# Altium PCB JHDH-8412V1.PcbDoc
Units mm, origin at the board's own origin, x right, y up, seen from the top; angles counter-clockwise.
Board outline 62.8 x 23.1 mm, 2 copper layers (Top Layer, Bottom Layer); 115 components, 96 nets, 386 pads, 163 vias.
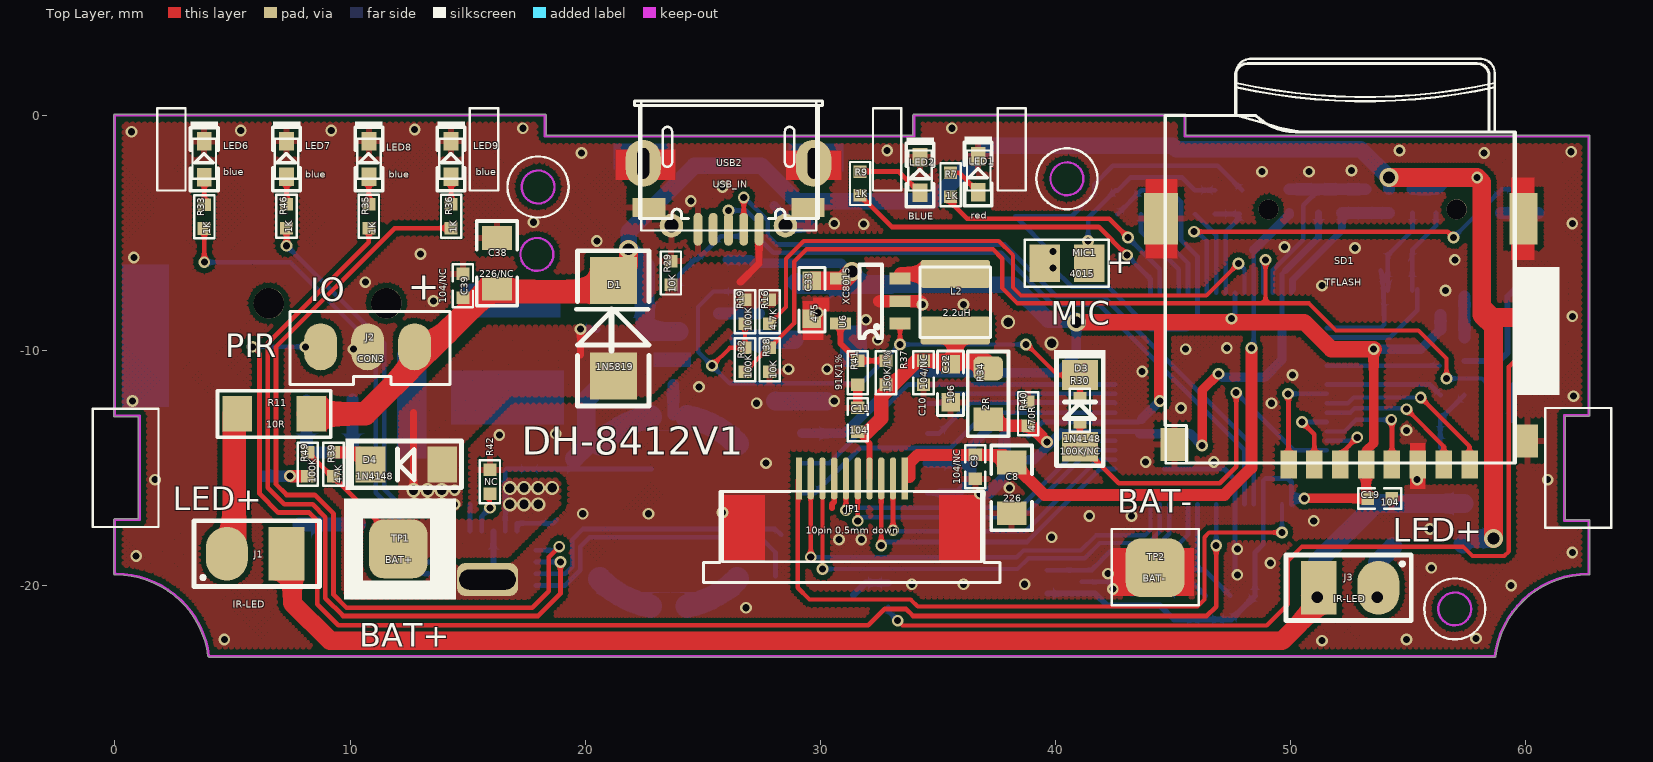
[diagram p0: Top Layer view]
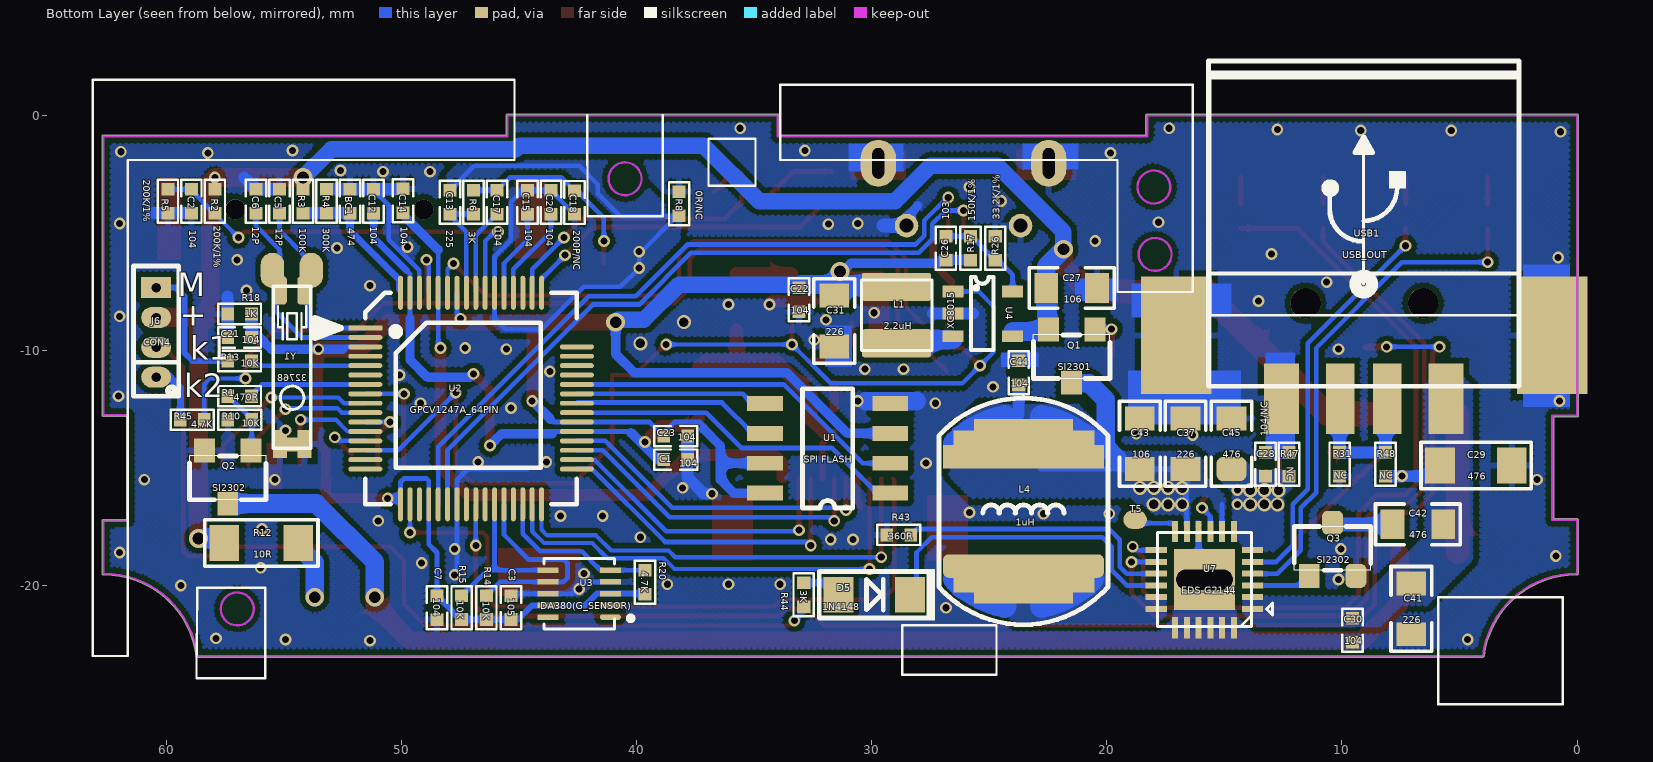
[diagram p1: Bottom Layer view, seen from below]
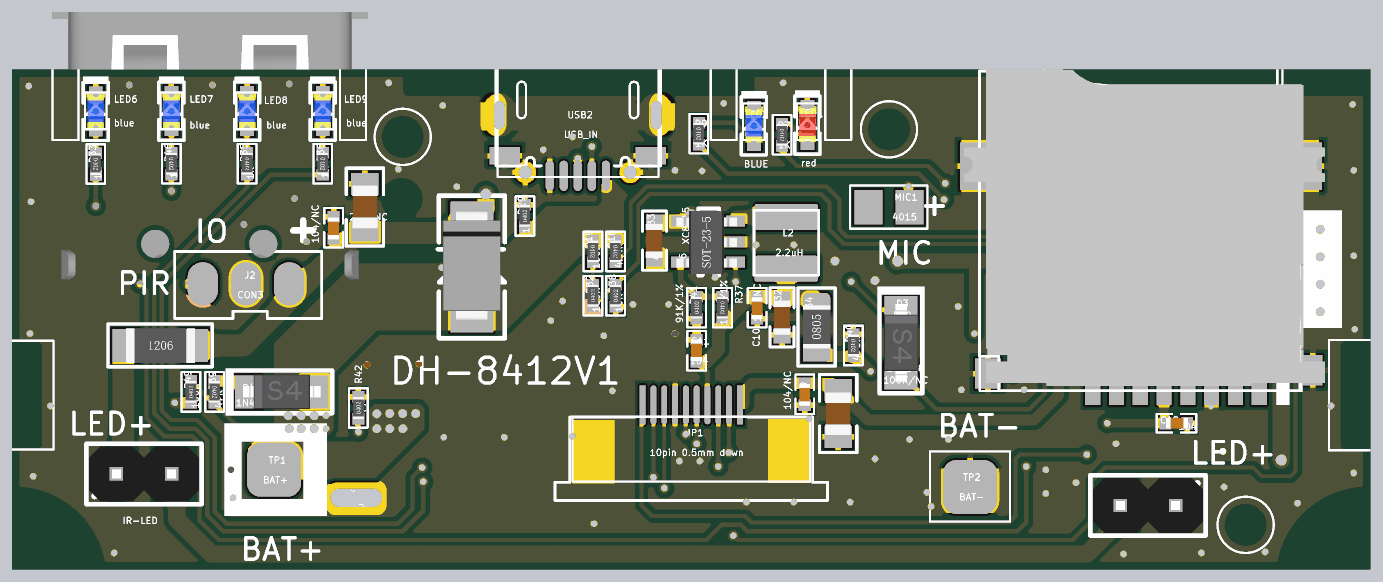
[diagram p2: 3D render of the assembled board from above, using the file's embedded part models]
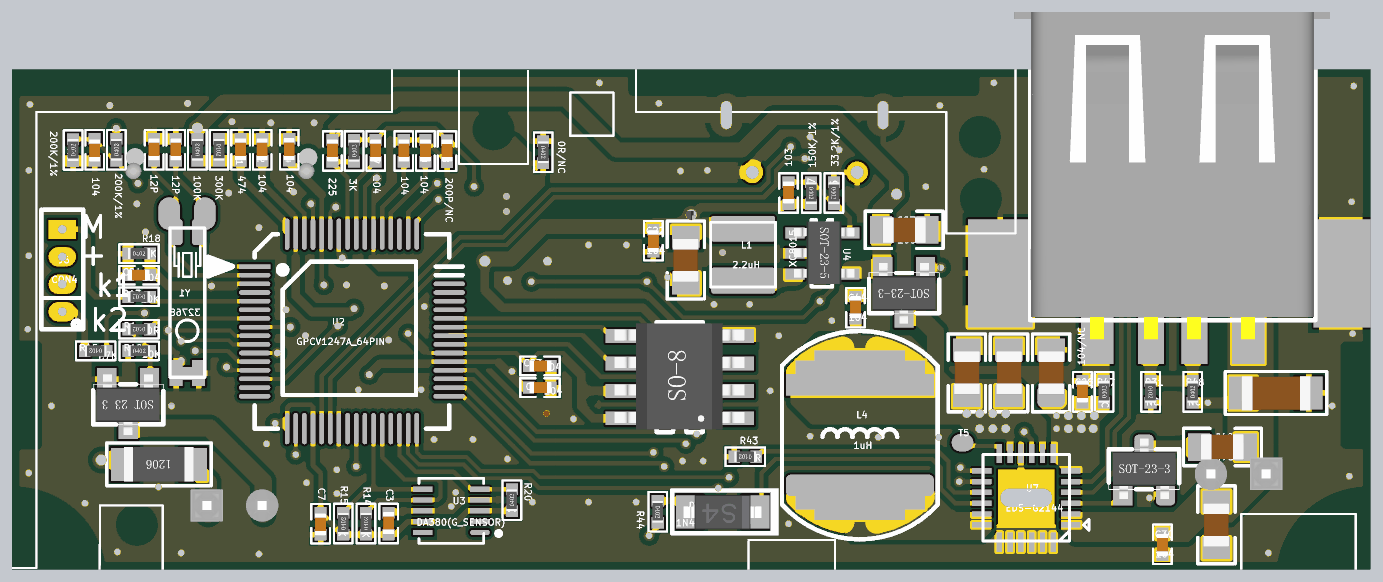
[diagram p3: 3D render of the assembled board from below, using the file's embedded part models]

## Layer stack, top to bottom
Top Solder: solder mask 0.0102, Solder Resist, Dk 3.5
Top Layer: signal copper 0.0356
Dielectric 1: dielectric 0.32, FR-4, Dk 4.8
Bottom Layer: signal copper 0.0356
Bottom Solder: solder mask 0.0102, Solder Resist, Dk 3.5

## Board outline
-0.05,-19.5 -0.05,-17.216 cw(c0,-17.216) 0,-17.165 0.999,-17.165 0.999,-12.835 0,-12.835 cw(c0,-12.784) -0.05,-12.784 -0.05,0 cw(c0,0) 0,0.05 18.29,0.05 cw(c18.29,0) 18.341,0 18.341,-0.85 33.95,-0.85 33.95,0 cw(c34,0) 34,0.05 45.5,0.05 cw(c45.5,0) 45.55,0 45.55,-0.85 62.7,-0.85 cw(c62.7,-0.9) 62.75,-0.9 62.75,-12.75 cw(c62.7,-12.75) 62.7,-12.8 61.7,-12.8 61.7,-17.2 62.7,-17.2 cw(c62.7,-17.25) 62.75,-17.25 62.75,-19.5 cw(c62.7,-19.5) 62.7,-19.55 62.669,-19.55 ccw(c62.669,-23.5) 58.75,-23.005 ccw(c62.669,-23.5) 58.75,-23.006 58.75,-23.005 cw(c58.7,-23) 58.7,-23.05 4,-23.05 3.95,-23.006 ccw(c0.031,-23.5) 0.031,-19.55 cw(c0.031,-19.5) 0.016,-19.548 cw(c0,-19.5)

## Design rules (kind name [scope] priority, off if disabled: settings)
Clearance [All] p1: gap=0.15 ignorepadtopadclearanceinfootprint=FALSE except(0.22: Arc-Fill Arc-Poly Arc-Region Track-Fill Track-Poly Track-Region SMDPad-Fill SMDPad-Poly SMDPad-Region THPad-Fill THPad-Poly THPad-Region Via-Fill Via-Poly Via-Region Fill-Fill Fill-Poly Fill-Region Poly-Poly Poly-Region Region-Region)
ComponentClearance [All] p1 off: gap=0.254 collisioncheckmode=3 verticalgap=0.254 showdistances=FALSE
Height [All] p1 off: minheight=0 maxheight=25.4 prefheight=12.7
HoleToHoleClearance [All] p1 off: gap=0.254 allowstackedmicrovias=TRUE
MinimumSolderMaskSliver [All] p1 off: minsoldermaskwidth=0.254
PolygonConnect PolygonConnect_1 [IsVia OR InNet('VCC_5V_USB')  OR InNet('VBAT') OR InNet('NetL4_1')  OR InNet('5V_OUT') OR InComponent('J2') OR InComponent('U7') OR InComponent('C30') OR InComponent('C41')] p1: connectstyle=Direct reliefconductorwidth=0.254 reliefentries=4 polygonreliefangle="90 Angle" airgapwidth=0.254
PolygonConnect [All] p2: connectstyle=Relief reliefconductorwidth=0.254 reliefentries=4 polygonreliefangle="90 Angle" airgapwidth=0.254
RoomDefinition JHDH-8412_1247 [InComponentClass('JHDH-8412_1247')] p1 off: confinementstyle=ConfineIn formatcopy=TRUE lockcomponents=FALSE outline 63.301,-27.85 68.4,-27.85 68.4,-25.1 63.301,-25.1
RoomDefinition JHDH-8412_powerbank [InComponentClass('JHDH-8412_powerbank')] p2 off: confinementstyle=ConfineIn formatcopy=TRUE lockcomponents=FALSE outline 63.3,-25 68.4,-25 68.4,-21.958 63.3,-21.958
RoutingVias [All] p1: holewidth=0.3 width=0.5 viastyle="Through Hole" minholewidth=0.3 minwidth=0.5 maxholewidth=0.711 maxwidth=1.27
SilkToSilkClearance [All] p1 off: silktosilkclearance=0.254
SilkToSolderMaskClearance [IsPad] p1 off: minsilkscreentomaskgap=0.254 clearancetoexposedcopper=TRUE
SolderMaskExpansion [All] p1: expansion=0.102
Width [All] p1: maxlimit=3 minlimit=0.16 preferedwidth=0.18
24 further rules are at their usual default settings.

## Components (designator, comment, footprint, x,y, rotation, side; value= is the part's Value field where it differs from the comment)
BC1 "474" C0402 52.2,-3.65 r90 bottom
C1 "104" C0402 38.35,-14.65 r180 bottom
C2 "104" C0402 58.95,-3.65 r270 bottom
C3 "105" C0402 45.35,-20.942 r90 bottom
C5 "12P" C0402 55.2,-3.65 r90 bottom
C6 "12P" C0402 56.2,-3.65 r90 bottom
C7 "104" C0402 48.5,-20.95 r270 bottom
C8 "226" C0805#1 38.15,-15.85 r270 top
C9 "104/NC" C0402 36.6,-14.958 r270 top
C10 "104/NC" C0402 34.4,-10.95 r270 top
C11 "104" C0402 31.6,-12.95 r90 top
C12 "104" C0402 51.2,-3.65 r90 bottom
C13 "225" C0402 47.95,-3.7 r90 bottom
C14 "104" C0402 49.95,-3.642 r90 bottom
C15 "104" C0402 44.65,-3.7 r90 bottom
C17 "104" C0402 45.95,-3.7 r90 bottom
C18 "200P/NC" C0402 42.65,-3.708 r90 bottom
C19 "104" C0402 53.8,-16.3 r0 top
C20 "104" C0402 43.65,-3.7 r90 bottom
C21 "104" C0402 56.9,-9.45 r0 bottom
C22 "104" C0402 33.1,-7.85 r270 bottom
C23 "104" C0402 38.35,-13.65 r180 bottom
C26 "103" C0402 26.85,-5.65 r90 bottom
C27 "106" C0805#1 21.5,-7.35 r180 bottom
C28 "104/NC" C0402 13.25,-14.85 r90 bottom (schematic designator C51)
C29 "476" c1206 4.3,-14.9 r180 bottom (schematic designator C50)
C30 "104" C0402 9.55,-21.9 r270 bottom (schematic designator C49)
C31 "226" C0805#1 31.6,-8.75 r270 bottom
C32 "106" C0603 35.55,-11.4 r270 top (schematic designator C37)
C33 "475" C0603 29.65,-7.85 r270 top (schematic designator C37)
C37 "226" C0805#1 16.65,-13.971 r90 bottom
C38 "226/NC" C0805#1 16.25,-6.3 r90 top
C39 "104/NC" c0402 14.8,-7.258 r270 top
C41 "226" C0805#1 7.05,-21 r270 bottom
C42 "476" C0805#1 6.77,-17.4 r0 bottom
C43 "106" C0805#1 18.6,-13.971 r90 bottom
C44 "104" C0402 23.75,-10.95 r90 bottom
C45 "476" C0805#2 14.7,-13.971 r90 bottom
D1 "1N5819" DO-214AC 21.206,-11.1 r90 top
D3 "1N4148" D1206 41.05,-12.574 r90 top
D4 "1N4148" D1206 12.4,-14.85 r180 top
D5 "1N4148" D1206 29.9,-20.4 r180 bottom
J1 "IR-LED" PIN-2/2.54 4.76,-18.65 r0 top value=0.02
J2 "CON3" SIP3/2.0 12.75,-9.85 r180 top value=0.03
J3 "IR-LED" PIN-2/2.54 53.75,-20.1 r180 top value=0.02
J6 "CON4" PIN-4/1.27 60.45,-11.14 r90 bottom value=0.04
JP1 "10pin 0.5mm down" 10PIN-MIPI/0.5 33.6,-15.45 r180 top value=0.09
L1 "2.2uH" L3015 28.95,-8.5 r90 bottom
L2 "2.2uH" L3015 35.75,-7.95 r270 top
L4 "1uH" CD75 23.55,-16.85 r90 bottom
LED1 "red" LED0603R 36.725,-2.502 r90 top
LED2 "BLUE" LED0603B 34.25,-2.538 r90 top
LED6 "blue" LED0603B 3.797,-1.867 r90 top
LED7 "blue" LED0603B 7.3,-1.862 r90 top
LED8 "blue" LED0603B 10.8,-1.862 r90 top
LED9 "blue" LED0603B 14.3,-1.862 r90 top
MIC1 "4015" MICe 41.45,-6.3 r180 top
Q1 "SI2301" SOT23#1 21.5,-10.25 r0 bottom
Q2 "SI2302" SOT23#1 57.4,-15.4 r0 bottom
Q3 "SI2302" SOT23#2 10.4,-18.45 r180 bottom
R1 "470R" R0402 56.9,-11.95 r0 bottom
R2 "200K/1%" R0402 57.95,-3.65 r90 bottom
R3 "100K" R0402 54.2,-3.65 r90 bottom
R4 "300K" R0402 53.2,-3.65 r270 bottom
R5 "200K/1%" R0402 59.95,-3.658 r90 bottom
R6 "3K" R0402 46.95,-3.7 r90 bottom
R7 "1K" R0402 35.55,-2.958 r270 top
R8 "0R/NC" R0402 38.2,-3.758 r270 bottom
R9 "1K" R0402 31.7,-2.9 r270 top
R10 "10K" R0402 56.892,-12.95 r180 bottom
R11 "10R" R1206 6.775,-12.7 r0 top
R12 "10R" R1206 55.975,-18.2 r0 bottom
R13 "10K" R0402 56.9,-10.45 r0 bottom
R14 "10K" R0402 46.4,-20.942 r90 bottom
R15 "10K" R0402 47.45,-20.942 r90 bottom
R16 "4.7K" R0402 27.85,-8.35 r270 top
R17 "150K/1%" R0402 25.8,-5.65 r270 bottom
R18 "1K" R0402 56.9,-8.45 r180 bottom
R19 "100K" R0402 26.8,-8.35 r270 top
R20 "4.7K" R0402 39.65,-19.858 r90 bottom
R26 "33.2K/1%" R0402 24.75,-5.65 r270 bottom
R29 "10K" R0402 23.65,-6.708 r90 top
R30 "100K/NC" R0402 41.05,-12.55 r90 top
R31 "NC" R0402 10.1,-14.85 r270 bottom
R32 "100K" R0402 26.8,-10.4 r90 top
R33 "1K" R0402 3.8,-4.308 r270 top
R34 "2R" R0805 37.15,-11.85 r90 top
R35 "1K" R0402 10.8,-4.292 r270 top
R36 "1K" R0402 14.3,-4.292 r270 top
R37 "150K/1%" R0402 32.8,-10.95 r270 top
R38 "10K" R0402 27.85,-10.4 r90 top
R39 "47K" R0402 9.3,-14.85 r270 top
R40 "470R" R0402 38.85,-12.7 r270 top
R41 "91K/1%" R0402 31.6,-10.95 r90 top
R42 "NC" R0402 15.95,-15.592 r90 top
R43 "360R" R0402 28.85,-17.85 r0 bottom
R44 "3K" R0402 32.9,-20.4 r270 bottom
R45 "4.7K" R0402 58.908,-12.95 r0 bottom
R46 "1K" R0402 7.3,-4.292 r270 top
R47 "NC" R0402 12.25,-14.85 r90 bottom
R48 "NC" R0402 8.15,-14.85 r90 bottom
R49 "100K" R0402 8.2,-14.85 r90 top
SD1 "TFLASH" TFC-0002 57.077,-4.001 r180 top locked
T5 "" PAD0#1 18.8,-17.2 r180 bottom
TP1 "BAT+" PAD0#2 12.05,-18.45 r0 top
TP2 "BAT-" PAD0#2 44.25,-19.25 r0 top
U1 "SPI FLASH" SOP8 29.217,-16.074 r0 bottom
U2 "GPCV1247A_64PIN" LQFP64-0.4 51.55,-9.05 r180 bottom
U3 "DA380(G_SENSOR)" QFN16-3*3-0.5-DA380 42.45,-20.35 r0 bottom
U4 "XC8015" SOT23-5 26.55,-7.495 r180 bottom
U6 "XC8015" SOT23-5 33.4,-8.85 r180 top
U7 "EDS-G2144" TQFN24-4*4 15.85,-19.75 r270 bottom
USB1 "USB_OUT" USB-A-SMT 6.55,-8 r180 bottom locked
USB2 "USB_IN" USB-009 27.4,-4.85 r0 top
Y1 "32768" XTAL-1.5X7 54.665,-10.72 r270 bottom

## Footprints (in the part's own frame and the unit in brackets; to place one, negate y for a bottom-side part, rotate by r counter-clockwise, add the part's x,y. Pads: shape width x height; smd on the part's side, far side on the other; paste and mask are expansions set on the pad)
10PIN-MIPI/0.5 [mm]
  rect 0.275x1.8 smd: 1(0,0) 10(4.5,0)
  oval 0.275x1.8 smd: 2(0.5,0) 3(1,0) 4(1.5,0) 5(2,0) 6(2.5,0) 7(3,0) 8(3.5,0) 9(4,0)
  Top Layer region: -3.2,0.714 -1.448,0.714 -1.448,3.482 -3.2,3.482
  Top Layer region: 7.7,3.482 5.948,3.482 5.948,0.714 7.7,0.714
  silkscreen extent -4.06,0.56 8.56,4.42
C0402 [mil] "0402"
  rect 21x22 smd: 1(-20,0) 2(20,0)
  silkscreen extent -36,-17 36,17, body extent -19,-10 21,10, height 10
c0402 [mil] "0402"
  rect 21x22 smd: 1(-20,0) 2(20,0)
  silkscreen extent -36,-17 36,17, body extent -19,-10 21,10, height 10
C0603 [mil] "0603"
  rect 31x31 smd: 1(-32,0) 2(32,0)
  silkscreen extent -54,-22 54,22, body extent -31,-16 32,15, height 24
C0805#1 [mil] "0805"
  rect 40x50 smd: 1(-42.5,0) 2(42.5,0)
  silkscreen extent -71,-34 71,34, body extent -39,-24 40,23, height 47
C0805#2 [mil] "0805"
  rrect50% 40x50 smd: 1(-42.5,0)
  rect 40x50 smd: 2(42.5,0)
  silkscreen extent -71,-34 71,34, body extent -39,-24 40,23, height 47
c1206 [mil] "1206"
  rect 50x60 smd: 1(-60,0) 2(60,0)
  silkscreen extent -92,-39 92,39, body extent -62,-32 63,31, height 63
CD75 [mm] "SMD inductance"
  rect 0.5x4.2 smd: 1(-3.675,0) 2(3.675,0)
  rect 1x6 smd: 1(-2.95,-0.025) 2(2.95,-0.025)
  rrect50% 1x6.85 smd: 1(-2.325,0)
  rect 1x6.85 smd: 2(2.325,0)
  Top Layer lines w1: -2.876,-2.926 cw(c0,0) -4.027,-0.786 ; 2.876,-2.926 ccw(c0,0) 4.027,-0.786 ; -4.027,0.786 cw(c0,0) -2.876,2.926 ; 4.027,0.786 ccw(c0,0) 2.876,2.926
  silkscreen extent -4.82,-3.6 4.82,3.6
D1206 [mil] "玻璃管"
  rect 50x60 smd: 1(-60,0) 2(60,0)
  silkscreen extent -92,-43 102,43, body extent -71,-32 71,31, height 43
DO-214AC [mm]
  rect 2x2 smd: 1(0,0.006) 2(4.064,0.006)
  silkscreen extent -1.27,-1.52 5.33,1.58, body extent -0.46,-1.32 4.65,1.35, height 2.12
L3015 [mm]
  rrect20% 1.2x2.95 smd: 1(-1.2,0) 2(1.2,0)
  silkscreen extent -1.5,-1.5 1.5,1.5, body extent -1.5,-1.5 1.5,1.5, height 1.6
LED0603B [mil] "0603-蓝灯"
  rect 31x25 smd: 1(-30,0) 2(30,0)
  silkscreen extent -53,-23 63,23, body extent -31,-16 31,15, height 20
LED0603R [mil] "0603-红灯"
  rect 31x25 smd: 1(-30,0) 2(30,0)
  silkscreen extent -53,-23 63,23, body extent -31,-16 31,15, height 20
LQFP64-0.4 [mm] "IC"
  rect 1.45x0.21 smd: 1(0,0)
  oval 1.45x0.21 smd: 2(0,-0.4) 3(0,-0.8) 4(0,-1.2) 5(0,-1.6) 6(0,-2) 7(0,-2.4) 8(0,-2.8) 9(0,-3.2) 10(0,-3.6) 11(0,-4) 12(0,-4.4) 13(0,-4.8) 14(0,-5.2) 15(0,-5.6) 16(0,-6) 33(9,-6) 34(9,-5.6) 35(9,-5.2) 36(9,-4.8) 37(9,-4.4) 38(9,-4) 39(9,-3.6) 40(9,-3.2) 41(9,-2.8) 42(9,-2.4) 43(9,-2) 44(9,-1.6) 45(9,-1.2) 46(9,-0.8)
  oval 0.21x1.45 smd: 17(1.5,-7.5) 18(1.9,-7.5) 19(2.3,-7.5) 20(2.7,-7.5) 21(3.1,-7.5) 22(3.5,-7.5) 23(3.9,-7.5) 24(4.3,-7.5) 25(4.7,-7.5) 26(5.1,-7.5) 27(5.5,-7.5) 28(5.9,-7.5) 29(6.3,-7.5) 30(6.7,-7.5) 31(7.1,-7.5) 32(7.5,-7.5) 49(7.5,1.5) 50(7.1,1.5) 51(6.7,1.5) 52(6.3,1.5) 53(5.9,1.5) 54(5.5,1.5) 55(5.1,1.5) 56(4.7,1.5) 57(4.3,1.5) 58(3.9,1.5) 59(3.5,1.5) 60(3.1,1.5) 61(2.7,1.5) 62(2.3,1.5) 63(1.9,1.5) 64(1.5,1.5)
  oval 1.45x0.21 on Bottom Overlay: 47(9,-0.4) 48(9,0)
  silkscreen extent -2.15,-7.5 9,1.5
MICe [mm]
  rect 1.3x1.6 smd: 1(0,0) 2(1.9,0)
  silkscreen extent -0.83,-1 2.75,1
PAD0#1 [mm]
  oval 1x0.8 smd: 1(0,0)
PAD0#2 [mm]
  rrect50% 2.5x2.5 smd: 1(0,0)
PIN-2/2.54 [mil] "Connector"
  oval 70x90 smd: 1(0,0)
  rect 60x90 smd: 2(100,0)
  silkscreen extent -55,-55 155,55, body extent -50,-50 150,50, height 342
PIN-4/1.27 [mm] "Connector"
  oval 0.889x1.27 hole 0.4: 1(0,0) 2(1.27,0) 3(2.54,0)
  rect 0.889x1.27 hole 0.4: 4(3.81,0)
  silkscreen extent -0.81,-0.97 4.72,0.97
QFN16-3*3-0.5-DA380 [mm]
  oval 0.9x0.24 smd: 1(-1.324,1)
  rect 0.9x0.24 smd: 2(-1.324,0.5) 3(-1.324,0) 4(-1.324,-0.5) 5(-1.324,-1) 6(1.324,-1) 7(1.324,-0.5) 8(1.324,0) 9(1.324,0.5) 10(1.324,1)
  silkscreen extent -2.29,-1.5 1.5,1.5
R0402 [mil] "0402"
  rect 21x22 smd: 1(-20,0) 2(20,0)
  silkscreen extent -36,-17 36,17, body extent -20,-10 20,10, height 14
R0805 [mil] "0805"
  rect 40x50 smd: 1(-42.5,0)
  rrect50% 40x50 smd: 2(42.5,0)
  silkscreen extent -71,-34 71,34, body extent -39,-25 40,25, height 22
R1206 [mil] "1206"
  rect 50x60 smd: 1(-62,0) 2(62,0)
  silkscreen extent -95,-39 95,39, body extent -62,-32 63,31, height 24
SIP3/2.0 [mm] "连接座/立式"
  oval 1.4x2 smd: 1(0,0) 2(2,0) 3(4,0)
  silkscreen extent -1.5,-1.5 5.3,1.6
SOP8 [mil] "IC"
  rect 60x25 smd: 1(0,0) 2(0,-50) 3(0,-100) 4(0,-150) 5(210,-150) 6(210,-100) 7(210,-50) 8(210,0)
  round 30 on Bottom Overlay: ""(82,3)
  silkscreen extent 63,-175 147,25, body extent -13,-173 224,20
SOT23#1 [mil] "SOT23"
  rect 35x40 smd: 1(-39,-45) 2(39,-45) 3(0,44)
  silkscreen extent -64,-36 64,38, body extent -57,-54 57,57
SOT23#2 [mil] "SOT23"
  rect 35x40 smd: 1(-39,-45)
  rrect50% 35x40 smd: 2(39,-45) 3(0,44)
  silkscreen extent -64,-36 64,38, body extent -57,-54 58,57
SOT23-5 [mil] "SOT25-5"
  rect 35x20 smd: 1(0,0) 2(0,-37) 3(0,-75) 4(100,-75) 5(100,0)
  silkscreen extent 30,-98 68,24, body extent -2,-93 108,21
TFC-0002 [mm] "TF卡外焊带弹片"
  round 0.85 hole 0.85 unplated: 0(0,0) 0(8,0.004)
  rect 0.7x1.2 smd: 1(7.15,10.858) 2(6.05,10.858) 3(4.95,10.858) 4(3.85,10.858) 5(2.75,10.858) 6(1.65,10.858) 7(0.55,10.858) 8(-0.55,10.858)
  rect 0.6x1.2 on Top Overlay: 9(-1.65,10.858)
  rect 0.9x1.4 smd: 10(-3.023,9.851)
  rect 1.2x2.2 smd: 10(-2.85,0.399)
  rect 1.2x1.4 smd: 10(12,10)
  rect 1.454x2.2 smd: 10(12.577,0.399)
  silkscreen extent -2.5,-6.2 12.4,10.8, body extent -3.6,-4.06 13.1,10.57, height 1.85
TQFN24-4*4 [mm] "G2144R51U"
  rect 2.6x2.6 / inner rect 1.4x2.6 / far side rrect50% 1.4x2.6 hole 0.85 slot 2.4 at 90 deg: 0(0,0)
  rect 0.25x0.9 smd: 1(1.25,2.05) 2(0.75,2.05) 3(0.25,2.05) 4(-0.25,2.05) 5(-0.75,2.05) 6(-1.25,2.05) 13(-1.25,-2.05) 14(-0.75,-2.05) 15(-0.25,-2.05) 16(0.25,-2.05) 17(0.75,-2.05) 18(1.25,-2.05)
  rect 0.9x0.25 smd: 7(-2.05,1.25) 8(-2.05,0.75) 9(-2.05,0.25) 10(-2.05,-0.25) 11(-2.05,-0.75) 12(-2.05,-1.25) 19(2.05,-1.25) 20(2.05,-0.75) 21(2.05,-0.25) 22(2.05,0.25) 23(2.05,0.75) 24(2.05,1.25)
  silkscreen extent -2,-2 2,2.9
USB-009 [mm]
  oval 0.381x1.4 smd: 1(0,0) 2(-0.65,0) 3(-1.3,0) 4(-1.95,0) 5(-2.6,0)
  oval 1.2x2.1 on Top Solder: 5(-5.2,2.833) 5(2.6,2.833)
  oval 1.5x2 hole 0.5 slot 1.3 at 90 deg: 5(-4.925,2.808) 5(2.325,2.808)
  rect 1.4x0.8 smd: 5(-4.675,0.933) 5(2.075,0.933)
  round 1 hole 0.6: 5(-3.725,0.158) 5(1.125,0.158)
  silkscreen extent -5.3,0.46 2.7,5.46
USB-A-SMT [mm]
  round 1.3 hole 1.3 unplated: 0(-5,0) 0(0,0)
  rect 1.5x3 smd: 1(0.975,-4.051) 4(-6.025,-4.051)
  rect 1.2x3 smd: 2(-1.525,-4.051) 3(-3.525,-4.051)
  rect 3x5 smd: 5(-10.5,-1.365) 5(5.5,-1.365)
  silkscreen extent -9.13,-3.53 4.08,10.31, body extent -9.84,-4.41 4.76,10.72, height 6.35
XTAL-1.5X7 [mm]
  rrect50% 1.2x0.6 smd: 1(-3.264,0.521) 2(-3.264,-0.521)
  rect 1.2x0.6 smd: 3(3.264,0.521) 4(3.264,-0.521)
  rect 0.6x1 smd: 3(3.28,0.015)
  silkscreen extent -3.45,-0.8 3.45,0.8, body extent -3.75,-0.8 3.75,0.8, height 1.5

## Part data
BC1 C1 C3 C5 C6 C7 C8 C9 C10 C11 C12 C13 C14 C15 C17 C18 C19 C20 C21 C22 C23 C28 C30 C37 C39 C41 C42 C43 C44 C45: library part CAP, "Capacitor"
C2 C26 C27 C31 C32 C33: library part CAP, "贴片电容"
C29: library part CAP1, "电解电容"
C38: library part CAP, "电容"
D1: "肖特基二极管"
D3 R32: library part DIODE, "二极管"
D4 D5: "玻璃二极管"
J1 J3: library part CON2, "Connector"
J2 J6: "Connector"
JP1: library part CON10, "Connector"
L1 L2 L4: library part L-1, "电感"
LED1: library part LED-R, "LED/红色"
LED2: library part LED-B, "LED/blue"
LED6 LED7: library part LED-b, "LED/蓝色"
LED8 LED9: library part LED-B, "LED/蓝色"
MIC1: library part MICROPHONE, "咪头"
Q1: library part MOSFETP, "场效应管/P"
Q2 Q3: library part MOSFETN, "Mosfet/N"
R1 R2 R3 R4 R5 R10 R11 R12 R13 R17 R18 R19 R26 R29 R30 R37 R38 R41 R45: library part RES, "贴片电阻"
R6 R7 R8 R9 R14 R15 R16 R20 R31 R33 R34 R35 R36 R39 R40 R42 R43 R44 R46 R47 R48 R49: library part RES, "Resistor"
SD1: library part SD-MICRO, "外卡卡座"
T5: library part CON1, "Test"
TP1 TP2: library part TP
U1: library part AT25010A
U2: library part GPCV12417A_64PIN
U3: library part DA380, "G-Sensor"
U4 U6: library part BL8021, "升压IC"
U7: library part Component_1
USB1: library part CON4, "Connector"
USB2: library part CON5, "Connector"
Y1: library part CRYSTAL, "Crystal"

## Free pads (board coordinates)
  oval 1x1.5 smd far side: 2(53.85,-6.6) 3(55.5,-6.6)

## Via types
v1: diameter 0.5, hole 0.3, Top Layer to Bottom Layer, tented both sides, 141 vias
v2: diameter 0.6, hole 0.4, Top Layer to Bottom Layer, tented both sides, 15 vias
v3: diameter 0.8, hole 0.5, Top Layer to Bottom Layer, tented both sides, 7 vias

## Nets (pads, with @x,y where several pads share a name; then routed paths per layer and width w, separated by ;. In a path a pad name is that pad's centre, name@x,y a point inside that pad or via, vN(x,y) a via of type N, cw(c..) or ccw(c..) an arc to the next point about the centre after c; other vN are vias at no path point)
5V: C27.1 C38.1 C39.2 D1.2 J2.1 J6.3 Q1.2 R2.2 R3.2 R11.2 R12.2 U4.4 | length 82.3
  Top Layer w0.8: D1.2 21.85,-6.386 v3(21.85,-5.7) ; v3(54.2,-2.65) v1(57.95,-2.65) 58.15,-2.85 58.15,-8.15 ; v3(58.65,-18) 58.65,-9 58.15,-8.5 58.15,-8.15 ; J6.3 58.6,-8.6 58.15,-8.15
  Top Layer w1: R11.2@8.225,-12.7 10.65,-12.7 15.85,-7.5 20.736,-7.5 D1.2
  Bottom Layer w0.5: R3.2 v3(54.2,-2.65)
  Bottom Layer w0.7: v3(21.85,-5.7) 21.85,-4.95 24.65,-2.15 27.5,-2.15 29,-3.65 34.8,-3.65 37.15,-1.3 45,-1.3 45.15,-1.45 53,-1.45 v3(54.2,-2.65)
  Bottom Layer w0.8: v3(21.85,-5.7) 22.58,-6.429 C27.1 ; C27.1@22.55,-7.4 22.55,-9.2 U4.4@24,-9.2 ; R12.2@57.35,-18.25 57.6,-18 v3(58.65,-18)
5V_OUT: C29.1 C30.1 C41.1 C42.1 R48.1 R49.1 U7.1 U7.2 USB1.1 | length 2.6
  Top Layer w0.5: v1(7.45,-15.35) 7.458,-15.358 R49.1
  Bottom Layer w0.5: C29.1@6.282,-15.358 R48.1
12MI: U2.4
AGND: C13.2 C15.2 C18.1 C20.2 MIC1.2 R8.2 U2.54 | length 29.9
  Bottom Layer w0.2: C18.1@42.65,-4.2 43.658,-3.192 C15.2 ; C15.2@44.831,-3.16 45.35,-3.679 45.35,-5.3 46.05,-6 U2.54 46.05,-8.65 45.6,-9.1 44.05,-9.1 42.25,-7.3 40.7,-7.3 v1(39.9,-6.5) 39.9,-5.9 38.3,-4.3 40.7,-4.3 41.656,-3.344 41.656,-2.944 42.45,-2.15 46.908,-2.15 C13.2
  other v1: 39.9,-5.8
AVDD: C8.1 C9.1 C14.1 JP1.1 U2.60 | length 27.8
  Top Layer w0.5: 33.8,-15.4 33.8,-14.8 34.15,-14.45 C9.1 37.83,-14.45 C8.1 39.53,-16.15 47.2,-16.15 48.35,-15 v1(48.35,-9.9)
  Bottom Layer w0.2: v1@48.45,-9.8 U2.60 48.45,-5.727
  Bottom Layer w0.4: 48.45,-5.727 49.95,-4.227 C14.1
CSI_D5: U2.29
CSI_D8: U2.26
CSI_D9: 
CSI_MCLK: JP1.10 U2.18 | length 29.7
  Top Layer w0.18: JP1.10 29.05,-15.5 29.05,-20.1 29.55,-20.6 33.85,-20.6 34.15,-20.9 46.05,-20.9 46.35,-20.6 46.35,-17.95 46.55,-17.75 v1(49.65,-17.75)
  Bottom Layer w0.18: v1(49.65,-17.75) U2.18
CSI_SCK: JP1.8 U2.31 | length 20
  Top Layer w0.18: v1(30.1,-19.3) JP1.8
  Bottom Layer w0.18: v1(30.1,-19.3) 38.4,-19.3 38.857,-18.843 41.257,-18.843 41.9,-18.2 43.95,-18.2 44.45,-17.7 U2.31
CSI_SDA: JP1.9 U2.32 | length 19.4
  Top Layer w0.18: v1(29.6,-18.8) JP1.9
  Bottom Layer w0.18: v1(29.6,-18.8) 38.363,-18.8 38.65,-18.513 41.087,-18.513 41.73,-17.87 43.813,-17.87 44.05,-17.633 U2.32
EN: D3.2 R19.2 R30.2 R32.2 U4.1 U6.1 | length 26.6
  Top Layer w0.18: v1(25.4,-10.65) 26.158,-9.892 R32.2 R19.2 ; v1(33.4,-9.75) U6.1 ; v1(38.75,-9.75) 38.8,-9.75 40.1,-11.05 D3.2 R30.2
  Bottom Layer w0.18: U4.1 25.455,-7.495 24.8,-8.15 24.8,-9.962 24.81,-9.972 24.81,-10.06 26.15,-11.4 31.75,-11.4 v1(33.4,-9.75) v1(38.75,-9.75)
G_INT_IOE2: R20.2 U2.30 U3.5 | length 7.1
  Bottom Layer w0.2: R20.2 U3.5 41.55,-19.35 42.35,-18.55 44.1,-18.55 44.85,-17.8 U2.30
G_SCL_IOE5: R15.2 U2.27 U3.6 | length 6.9
  Bottom Layer w0.2: U3.6 46.366,-19.35 R15.2 ; 46.05,-19.35 U2.27
G_SDA_IOE4: R14.2 U2.28 U3.7 | length 8.9
  Bottom Layer w0.2: U2.28 45.65,-17.85 44.6,-18.9 43.1,-18.9 42.95,-19.05 42.95,-19.7 43.1,-19.85 U3.7 45.816,-19.85 R14.2
GND: BC1.2 C1.2 C2.2 C3.2 C5.2 C6.2 C7.2 C8.2 C9.2 C10.2 C11.2 C12.2 C14.2 C19.2 C21.2 C22.2 C23.2 C27.2 C28.2 C29.2 C30.2 C31.2 C32.2 C33.2 C37.2 C38.2 C39.1 C41.2 C43.2 C44.2 C45.2 J2.2 JP1.7 LED1.2 LED2.2 LED6.2 LED7.2 LED8.2 LED9.2 Q2.2 Q3.2 R4.1 R5.1 R8.1 R10.1 R18.1 R26.1 R29.2 R31.2 R38.1 R40.1 R41.1 R42.2 R43.2 R47.2 SD1.6 SD1.10 TP2.1 U1.4 U2.23 U2.62 U3.4 U3.8 U4.2 U6.2 U7.0 U7.10 U7.19 U7.20 U7.21 U7.22 U7.23 U7.24 USB1.4 USB1.5 USB2.5@22.475,-2.042 USB2.5@22.725,-3.917 USB2.5@23.675,-4.692 USB2.5@24.8,-4.85 USB2.5@28.525,-4.692 USB2.5@29.475,-3.917 USB2.5@29.725,-2.042 Y1.3 Y1.4 | length 40
  Top Layer w0.25: 30.5,-16.7 30.5,-16.55 30.6,-16.45 JP1.7
  Top Layer w0.4: C11.2 R41.1
  Top Layer w0.5: 32.49,-7.91 v1@34.3,-7.91
  Bottom Layer w0.2: U3.4 42.25,-19.85 42.75,-20.35 U3.8 C3.2@45.266,-20.35 ; U2.62 49.25,-6.584 50.55,-5.284 50.55,-3.834 C12.2@51.242,-3.142
  Bottom Layer w0.21: 44.65,-15.05 47.2,-15.05 47.65,-15.5 U2.23 v1@47.65,-19.4
  Bottom Layer w0.25: U7.0@16.1,-19.5 U7.10
  Bottom Layer w0.4: 28.05,-3.85 28.709,-4.509 USB2.5@28.525,-4.692
  Bottom Layer w0.5: 25.7,-8.435 27.4,-8.435 ; v1(36.8,-16.1) 37.15,-16.1 37.842,-15.408 C1.2 C23.2 ; C14.2@49.958,-3.142 C12.2 51.242,-3.142 BC1.2 R4.1 ; C5.2 C6.2 56.208,-3.142 56.7,-2.65 ; C21.2 R18.1 57.408,-7.708 ; C2.2 60.558,-4.158
  Bottom Layer w0.6: USB2.5@28.525,-4.692 29.492,-4.692
  Bottom Layer w0.8: 28.1,-12.15 30.264,-12.164
  other v1: 51.35,-22.35 4.65,-22.3 54.95,-22.3 57.9,-22.25 26.85,-20.95 42.45,-20.15 59.4,-20 33.9,-19.95 36.1,-19.95 38.7,-19.95 10.15,-19.75 47.75,-19.55 42.25,-19.5 56,-19.25 49.15,-19.05 0.9,-18.75 62,-18.6 10.05,-18.45 47.75,-18.45 30.8,-18.05 31.75,-18.05 39.85,-17.95 55.95,-17.6 51,-17.25 41.45,-17.05 43.25,-17.05 19.9,-16.95 22.7,-16.95 25.85,-16.9 38.05,-15.85 1.7,-15.5 55.4,-15.5 60.95,-15.5 27.7,-14.8 43.85,-14.75 46.75,-14.75 16.35,-13.6 18.75,-13.55 54.95,-13.4 45.35,-12.45 27.3,-12.25 49.2,-12.25 0.75,-12.15 30.6,-12.15 62.05,-11.95 24.85,-11.55 50.1,-11.05 43.7,-10.9 28.65,-10.8 30.3,-10.8 10.15,-9.95 45.55,-9.95 47.3,-9.9 32.45,-9.55 31.95,-8.7 62,-8.55 29.9,-8.4 34.35,-8.05 36.1,-8.05 13.55,-7.9 56.6,-7.45 51.35,-7.25 10.65,-7.1 57,-6.15 0.8,-6.05 13,-5.9 52.75,-5.65 49.75,-5.6 20.5,-5.35 31.85,-4.631 30.6,-4.6 62,-4.6 17.8,-4.55 24.5,-3.65 25.85,-3.05 48.8,-2.4 50.8,-2.4 52.6,-2.35 19.85,-1.6 58.25,-1.6 61.95,-1.55 32.85,-1.5 54.65,-1.5 0.7,-0.7 5.35,-0.65 9.2,-0.65 12.75,-0.6 17.35,-0.55 35.6,-0.55
  other v2: 39.85,-9.7 38,-8.8
IOA0: U2.43
IOA1: U2.44
IOA2: U2.45
IOA3: U2.46
IOA4: 
IOA5: 
IOA6: R9.2 U2.49 | length 14.4
  Top Layer w0.2: R9.2 33.042,-4.75 41.85,-4.75 v1(43.05,-5.95)
  Bottom Layer w0.2: v1(43.05,-5.95) 44.05,-6.95 U2.49
IOA7: R7.2 U2.50 | length 11.3
  Top Layer w0.2: R7.2 35.55,-3.7 36.25,-4.4 42.3,-4.4 v1(43.1,-5.2)
  Bottom Layer w0.2: v1(43.1,-5.2) 44.45,-6.55 U2.50
IOB9: U2.19
IOC12: D3.1 R30.1 U2.14 | length 16.6
  Top Layer w0.2: R30.1 D3.1 41.148,-14.098 42.7,-15.65 46.993,-15.65 47.7,-14.943 v1(47.7,-11.8)
  Bottom Layer w0.2: v1(47.7,-11.8) 50.15,-14.25 U2.14
IOC13: U2.15
IOC14: U2.16
IOD10: R13.1 U2.5 | length 4.8
  Bottom Layer w0.2: U2.5 R13.1@56.35,-10.65
IOD13: R1.1 U2.7 | length 5
  Bottom Layer w0.2: U2.7 55.942,-11.45 R1.1@56.392,-11.9
IOE7: J2.3 U2.25 | length 59.6
  Top Layer w0.2: v1(5.85,-9.85) 6.15,-10.15 6.15,-16.1 6.95,-16.9 8.26,-16.9 8.6,-17.24 8.6,-20.8 9.5,-21.7 32.05,-21.7 32.75,-21 33.65,-21 33.95,-21.3 46.45,-21.3 46.85,-20.9 v1(46.85,-18.3)
  Top Layer w0.3: v1(8.1,-9.85) J2.3@9,-9.85
  Bottom Layer w0.2: v1(5.85,-9.85) v1(8.1,-9.85) ; v1(46.85,-18.3) U2.25
ISP_IOD11: U2.6
LINE0: C2.1 R2.1 R5.2 U2.55 | length 17.9
  Top Layer w0.18: v1(45.9,-4.95) 56.7,-4.95 v1(56.95,-5.2)
  Bottom Layer w0.18: v1(45.9,-4.95) 46.05,-4.95 46.45,-5.35 U2.55 ; v1(56.95,-5.2) 59,-3.15 R5.2
MCN: JP1.2 U2.34 | length 12.9
  Top Layer w0.2: v1(33.1,-17.65) JP1.2
  Bottom Layer w0.2: v1(33.1,-17.65) 33.15,-17.7 38.75,-17.7 41.8,-14.65 U2.34
MCP: JP1.3 U2.33 | length 14.1
  Top Layer w0.2: v1(32.6,-18.3) JP1.3
  Bottom Layer w0.2: v1(32.6,-18.3) 32.75,-18.15 38.8,-18.15 41.9,-15.05 U2.33
MDN: JP1.6 U2.36 | length 14
  Top Layer w0.2: v1(31.1,-16.8) JP1.6
  Bottom Layer w0.2: v1@31.125,-16.825 31.25,-16.7 38.5,-16.7 41.35,-13.85 U2.36
MDP: JP1.5 U2.35 | length 14
  Top Layer w0.2: v1(31.6,-17.25) JP1.5
  Bottom Layer w0.2: v1(31.6,-17.25) 31.75,-17.1 38.6,-17.1 41.45,-14.25 U2.35
MICBIAS: C13.1 R6.1 U2.57 | length 4.5
  Bottom Layer w0.2: R6.1@46.8,-4.2 C13.1@47.85,-4.2 ; U2.57 47.25,-4.95 C13.1@47.85,-4.35
MICP: C17.1 U2.56 | length 3.7
  Bottom Layer w0.2: C17.1 45.958,-4.208 46.85,-5.1 U2.56
MICVREF: C20.1 U2.52 | length 4
  Bottom Layer w0.2: C20.1 43.65,-4.95 45.25,-6.55 U2.52
MODE: J6.4 R13.2 | length 5.4
  Bottom Layer w0.25: R13.2 58.9,-10.45 59.25,-10.1 59.25,-7.7 59.62,-7.33 J6.4@60.15,-7.33
NetC17_2: C17.2 C18.2 MIC1.1 R6.2 | length 8.3
  Top Layer w0.2: MIC1.1@41.4,-6.3 v1(41.4,-5.35)
  Bottom Layer w0.2: v1(41.4,-5.35) 41.4,-4.35 42.55,-3.2 C18.2 43.2,-2.65 45.408,-2.65 C17.2@45.942,-3.184 ; C17.2 C17.2@45.942,-3.184 ; R6.2@46.8,-3.184 C17.2@45.942,-3.184
NetC26_2: C26.2 R17.1 R26.2 U4.5 | length 4.2
  Bottom Layer w0.2: R26.2 25.766,-5.142 R17.1 C26.2
  Bottom Layer w0.21: U4.5 24.01,-6.79 R26.2@24.696,-6.104
NetC42_2: C42.2 Q3.3 | length 2.5
  Bottom Layer w0.6: C42.2 Q3.3@10.382,-17.4
NetD4_2: D4.2 R39.1 | length 1.1
  Top Layer w0.5: R39.1 D4.2@10.368,-14.342
NetD5_1: D5.1 R44.1 | length 1.7
  Bottom Layer w0.3: D5.1 31.932,-19.892 R44.1
NetD5_2: D5.2 U7.16 | length 12.9
  Bottom Layer w0.2: U7.16 19.152,-20 19.8,-19.352 19.8,-18.35 20.2,-17.95 27.45,-17.95 28.1,-18.6 28.1,-19.6
NetJ1_1: J1.1 R11.1 | length 5.9
  Top Layer w1: J1.1@5.075,-18.585 R11.1@5.075,-12.7
NetJ1_2: J1.2 J3.2 Q2.3 | length 56.1
  Top Layer w0.8: J1.2@7.55,-18.65 7.55,-20.75 9.15,-22.35 49.65,-22.35 51.15,-20.85 v3(51.15,-20.5)
  Bottom Layer w0.8: v3(51.15,-20.5) 51.15,-19 53.632,-16.518 Q2.3
NetJ3_1: J3.1 R12.1 | length 2.4
  Bottom Layer w0.8: v3(53.7,-20.5) 53.7,-19.025 R12.1@54.375,-18.35
NetL1_1: L1.1 U4.3 | length 2.4
  Bottom Layer w0.8: U4.3@26.55,-9.55 L1.1@28.9,-9.55
NetL2_1: L2.1 U6.3 | length 2.3
  Top Layer w0.6: U6.3@33.45,-6.75 L2.1
NetL4_1: L4.1 U7.17 U7.18
NetLED1_1: LED1.1 R7.1 | length 1.5
  Top Layer w0.2: R7.1 35.911,-2.45 LED1.1
NetLED2_1: LED2.1 R9.1 | length 2.9
  Top Layer w0.2: R9.1 33.342,-2.392 LED2.1
NetLED6_1: LED6.1 R33.1 | length 1.2
  Top Layer w0.2: R33.1 LED6.1@3.8,-2.612
NetLED7_1: LED7.1 R46.1 | length 1.2
  Top Layer w0.2: R46.1 LED7.1
NetLED8_1: LED8.1 R35.1 | length 1.2
  Top Layer w0.2: R35.1 LED8.1
NetLED9_1: LED9.1 R36.1 | length 1.2
  Top Layer w0.2: R36.1 LED9.1
NetQ2_1: Q2.1 R1.2 R10.2 | length 2.7
  Bottom Layer w0.2: Q2.1@56.384,-14.132 R10.2 56.384,-12.924 R1.2@57.408,-11.9
NetQ3_1: Q3.1 U7.3 | length 2.1
  Bottom Layer w0.2: Q3.1@11.748,-20 U7.3
NetR31_1: R31.1 R48.2 USB1.2 USB1.3 | length 6.4
  Bottom Layer w0.5: USB1.2@8.15,-12.126 R48.2 R31.1 USB1.3@10.1,-12.076
NetR33_2: R33.2 U7.4 | length 21.6
  Top Layer w0.2: v1(3.8,-6.25) R33.2
  Bottom Layer w0.2: v1(3.8,-6.25) 7.45,-6.25 11.1,-9.9 11.1,-16.05 11.75,-16.7 11.75,-18.5 12.75,-19.5 U7.4
NetR35_2: R35.2 U7.14 | length 32.4
  Top Layer w0.2: R35.2 10.8,-5.4 6.5,-9.7 6.5,-15.85 7.2,-16.55 8.405,-16.55 8.95,-17.095 8.95,-20.545 9.705,-21.3 18,-21.3 18.95,-20.35 v1(18.95,-19)
  Bottom Layer w0.2: U7.14 v1(18.95,-19)
NetR36_2: R36.2 U7.13 | length 34.6
  Top Layer w0.2: R36.2 11.895,-4.8 6.85,-9.845 6.85,-15.7 7.3,-16.15 8.5,-16.15 9.3,-16.95 9.3,-20.4 9.85,-20.95 17.75,-20.95 18.45,-20.25 18.45,-18.793 18.893,-18.35 v1(18.9,-18.35)
  Bottom Layer w0.2: U7.13 18.75,-18.5 v1(18.9,-18.35)
NetR37_1: R37.1 R41.2 U6.5 | length 3
  Top Layer w0.25: U6.5 30.86,-9.702 R41.2 R37.1@32.7,-10.442
NetR42_1: R42.1 U7.9 | length 1.7
  Top Layer w0.2: R42.1@15.8,-16.25 15.95,-16.4 v1(15.95,-16.7)
  Bottom Layer w0.2: U7.9 15.6,-17.05 v1(15.95,-16.7)
NetR43_1: R43.1 U7.15 | length 12
  Bottom Layer w0.2: U7.15 19.157,-19.5 19.45,-19.207 19.45,-18.05 19.9,-17.6 28.092,-17.6 R43.1
NetR46_2: R46.2 U7.5 | length 17.5
  Top Layer w0.2: v1(7.3,-5.55) R46.2
  Bottom Layer w0.2: v1(7.3,-5.55) 11.45,-9.7 11.45,-15.9 12.1,-16.55 12.1,-18.3 12.8,-19 U7.5
NetT5_1: T5.1 U7.12 | length 2.1
  Bottom Layer w0.2: U7.12 17.1,-17.35 18.65,-17.35 T5.1
PB_KEY: J6.2 R44.2 | length 38.9
  Top Layer w0.18: v1(33.3,-21.5) 33.5,-21.7 49,-21.7 49.9,-20.8 49.9,-18.95 50.5,-18.35 57.35,-18.35 57.75,-18.75 59.1,-18.75 59.3,-18.55 59.3,-10.7 60.13,-9.87 J6.2
  Bottom Layer w0.18: R44.2 32.9,-21.1 v1(33.3,-21.5)
PW_KEY: J6.1 R45.2 | length 2.6
  Bottom Layer w0.3: R45.2 59.416,-11.584 59.86,-11.14 J6.1
PWR_ON0: R32.1 R38.2 R45.1 U2.61 | length 43.7
  Top Layer w0.18: R32.1 26.8,-10.9 R38.2@27.808,-9.892 ; R38.2 28.9,-8.842 28.9,-6.217 29.417,-5.7 37.35,-5.7 37.75,-6.1 37.75,-7.35 38.4,-8 48.95,-8 ; v1(48.95,-6.15) 48.95,-8 ; v1(56.65,-11.2) 56.65,-10.35 55.45,-9.15 51.95,-9.15 50.8,-8 48.95,-8
  Bottom Layer w0.18: U2.61 48.85,-6.2 48.9,-6.15 v1(48.95,-6.15) ; v1(56.65,-11.2) 57.65,-11.2 58.15,-11.2 58.4,-11.45 R45.1
PWR_ON1: R16.2 U2.59 | length 26.3
  Top Layer w0.18: R16.2 28.55,-8.158 28.55,-6.1 29.3,-5.35 37.6,-5.35 38.2,-5.95 38.2,-7.32 38.55,-7.67 46.43,-7.67 v1(47.8,-6.3)
  Bottom Layer w0.18: v1(47.8,-6.3) 48.05,-6.55 U2.59
SDC_CLK: SD1.5 U2.12 | length 4.8
  Top Layer w0.2: SD1.5 v1@54.327,-12.977
  Bottom Layer w0.18: U2.12 52.3,-13.45 52.8,-12.95 v1(54.3,-12.95)
SDC_CMD: SD1.3 U2.13 | length 2.4
  Top Layer w0.18: SD1.3@52.127,-14.423 v1(52.85,-13.7)
  Bottom Layer w0.18: U2.13 52.7,-13.85 v1(52.85,-13.7)
SDC_DATA0: SD1.7 U2.10 | length 6.5
  Top Layer w0.18: v1(54.95,-12.5) 56.527,-14.077
  Top Layer w0.2: SD1.7 56.527,-14.077
  Bottom Layer w0.18: U2.10 52.55,-12.65 52.74,-12.46 54.91,-12.46 v1(54.95,-12.5)
SDC_DATA1: SD1.8 U2.9 | length 7.8
  Top Layer w0.18: v1(55.55,-12) 57.627,-14.077 SD1.8@57.627,-14.3
  Top Layer w0.2: SD1.8 SD1.8@57.627,-14.3
  Bottom Layer w0.18: U2.9 52.45,-12.25 52.7,-12 v1(55.55,-12)
SDC_DATA2: SD1.1 U2.8 | length 4.6
  Top Layer w0.2: SD1.1 v1@49.927,-11.877
  Bottom Layer w0.2: v1(49.9,-11.85) U2.8
SDC_DATA3: SD1.2 U2.11 | length 3.1
  Top Layer w0.2: v1(50.5,-13.05) 51.027,-13.577 SD1.2
  Bottom Layer w0.2: v1(50.5,-13.05) U2.11
SPI_CLK: U1.6 U2.40 | length 8.6
  Bottom Layer w0.2: U1.6 35.066,-13.534 36.379,-12.221 42.521,-12.221 U2.40
SPI_CS: U1.1 U2.39 | length 14.8
  Bottom Layer w0.2: U1.1 29.776,-16.074 31.7,-14.15 35.55,-14.15 37.05,-12.65 U2.39
SPI_RX: U1.5 U2.41 | length 8.2
  Bottom Layer w0.2: U1.5 35.086,-12.264 35.5,-11.85 U2.41
SPI_TX: U1.2 U2.42 | length 14.7
  Bottom Layer w0.2: U1.2 30.396,-14.804 33.75,-11.45 U2.42
USB5V: 
USB_DM: U2.21 USB2.2 | length 30.3
  Top Layer w0.18: USB2.2 USB2.2@26.75,-4.65
  Top Layer w0.2: USB2.2@26.75,-4.65 v1(26.75,-3.5)
  Bottom Layer w0.2: v1(26.75,-3.5) 26.8,-3.5 27.775,-4.475 27.775,-5.125 28.15,-5.5 37.845,-5.5 40.045,-7.7 42.05,-7.7 48.45,-14.1 U2.21
USB_DP: U2.22 USB2.3 | length 29.7
  Top Layer w0.18: USB2.3 v1(26.1,-4.05)
  Bottom Layer w0.2: v1(26.1,-4.05) 26.855,-4.05 27.425,-4.62 27.425,-5.275 28,-5.85 37.7,-5.85 39.9,-8.05 41.872,-8.05 48.05,-14.228 U2.22
V33_RTC: BC1.1 R3.1 R4.2 U2.64 | length 6.3
  Bottom Layer w0.2: U2.64 U2.64@50.05,-7.4
  Bottom Layer w0.3: U2.64@50.1,-7.4 50.1,-7 52.2,-4.9 BC1.1
  Bottom Layer w0.5: BC1.1 R4.2 R3.1
VBAT: C37.1 C43.1 C44.1 L4.2 Q1.3 R39.2 R49.2 TP1.1 U7.8 U7.11 | length 21.5
  Top Layer w0.2: R49.2 R39.2@9.216,-15.358 ; R39.2@9.358,-15.358 R39.2 9.3,-15.4 11.9,-18 TP1.1@11.9,-18.7
  Bottom Layer w0.2: U7.8 15.1,-16.55 ; U7.11 C37.1@16.6,-15.1 ; C37.1 C43.1 22.825,-15.05
  Bottom Layer w0.5: 23.75,-12.742 C44.1
  Bottom Layer w0.8: 19.55,-14.6 20.05,-14.1 20.05,-12.1 20.75,-11.4 Q1.3@21.45,-11.4
  other v2: 16.8,-16.55 17.4,-16.55 18.008,-16.55 16.8,-15.86 17.4,-15.85 18,-15.85 18.6,-15.85
VCC33_ADC: C15.1 U2.53 | length 3.8
  Bottom Layer w0.2: C15.1 44.65,-5.3 45.65,-6.3 U2.53
VCC_5V_USB: C28.1 C45.1 D1.1 D4.1 Q1.1 R16.1 R19.1 R29.1 R47.1 U7.6 U7.7 USB2.1 | length 7.7
  Top Layer w0.3: v2(12.7,-15.95) 12.7,-12.65 ; 19.8,-10.2 v1(19.8,-9.1) ; 26.6,-7.1 27.4,-6.3 USB2.1
  Bottom Layer w0.3: v1(19.8,-9.1) 20.502,-9.1 Q1.1
  other v1: 14.45,-16.55 14.45,-15.95
  other v2: 12.75,-16.55 13.3,-16.55 13.9,-16.55 13.3,-15.95 13.9,-15.95
VCC_12: C1.1 C12.1 R34.1 R40.2 U2.37 U2.63 | length 23.9
  Top Layer w0.4: v1(46.25,-14.05) 46.25,-11.7 v1(46.95,-11)
  Top Layer w0.5: R34.1@37.35,-12.879 37.678,-13.208 R40.2 38.958,-13.208 v1(39.65,-13.9)
  Bottom Layer w0.2: 40.35,-13.45 U2.37 43.5,-13.45 ; 49.65,-8.65 U2.63 49.65,-6.75 49.8,-6.6
  Bottom Layer w0.3: 49.8,-6.6 51.2,-5.2 C12.1
  Bottom Layer w0.4: C1.1 39.1,-14.65 40.25,-13.5 ; 43.6,-13.55 45.75,-13.55 v1(46.25,-14.05) ; v1(46.95,-11) 47.1,-11.15 48.9,-11.15 49.65,-10.4 49.65,-8.65
VCC_15: C10.1 C11.1 C32.1 JP1.4 L2.2 R34.2 R37.2 | length 10.9
  Top Layer w0.25: C11.1 32.1,-13.958 JP1.4
  Top Layer w0.6: 32,-13.5 32.6,-12.9 32.6,-11.95 34.108,-10.442 34.5,-10.442 C32.1@35.75,-10.442 ; C32.1@35.75,-10.537 C32.1@35.75,-10.442 ; L2.2 C32.1@35.75,-10.442 ; R34.2@37.35,-10.72 37.072,-10.442 C32.1@35.75,-10.442
VCC_33: C3.1 C7.1 C19.1 C21.1 C22.1 C23.1 C26.1 C31.1 C33.1 L1.2 R14.1 R15.1 R17.2 R18.2 R20.1 SD1.4 U1.3 U1.7 U1.8 U2.3 U2.17 U2.20 U2.38 U2.58 U3.3 U3.9 U6.4 | length 101.4
  Top Layer w0.4: v1(50.6,-16.3) C19.1 ; C19.1@53.227,-16.242 SD1.4 53.227,-14.273 53.55,-13.95 v1(53.55,-9.95)
  Top Layer w0.5: v1(44.45,-12.15) 44.45,-8.85
  Top Layer w0.7: v3(40.9,-8.8) 50.6,-8.8 51.75,-9.95 v1(53.55,-9.95)
  Top Layer w0.8: C33.1 30.963,-7.037 v3(31.35,-6.65)
  Bottom Layer w0.2: U1.8 U1.8@35.1,-16.074 ; 36.446,-15.504 36.5,-15.45 36.5,-14.75 ; 37.075,-13.275 37.3,-13.05 38.4,-13.05 38.858,-13.508 C23.1 39.458,-13.05 U2.38 43.55,-13.05 43.675,-12.925
  Bottom Layer w0.21: v1(47.5,-8.65) 47.65,-8.5 U2.58 ; C7.1 48.5,-18.6 48.85,-18.25 U2.20 48.85,-15.55 48.95,-15.45 49.9,-15.45 50.05,-15.6 U2.17 ; U2.3 52.413,-9.85 52.513,-9.95
  Bottom Layer w0.25: R20.1@39.666,-20.35 U3.3 41.7,-20.35 42.2,-20.85 U3.9 44.45,-20.85 45.05,-21.45 C3.1 R14.1 R15.1 47.492,-21.45 C7.1
  Bottom Layer w0.4: R17.2@26.05,-6.15 27.05,-6.15 27.2,-6.3 30.9,-6.3 v3@31.3,-6.7 ; U1.3 31.03,-13.534 33.614,-10.95 40.1,-10.95 40.9,-10.15 v3(40.9,-8.8) ; v3(31.35,-6.65) 31.5,-6.65 v3@31.65,-6.8 ; C31.1@31.65,-7.271 31.65,-7.2 v3@31.65,-6.8 ; C31.1@32.05,-7.2 v3@31.65,-6.8 ; U1.7 36.446,-14.804 ; U1.8@35.1,-16.074 35.876,-16.074 36.446,-15.504 36.446,-14.804 ; 37.15,-13.35 36.446,-14.054 36.446,-14.804 ; 43.675,-12.925 v1(44.45,-12.15) ; U2.17@50.15,-16.3 v1(50.6,-16.3) ; 52.513,-9.95 v1(53.55,-9.95) 55.55,-9.95 56.392,-9.108
  Bottom Layer w0.5: 56.392,-9.108 R18.2@56.392,-8.5
  Bottom Layer w0.7: C22.1@32.992,-7.2 38.2,-7.2 39.7,-8.7 40.8,-8.7 v3(40.9,-8.8)
  Bottom Layer w0.8: L1.2@29,-7.1 29.1,-7.2 31.65,-7.2 32.05,-7.2 C22.1@32.992,-7.2
X32KI: C6.1 pad.3 U2.2 Y1.2 | length 8.9
  Bottom Layer w0.2: U2.2 54.25,-9.45 55.4,-8.3 Y1.2@55.4,-7.4 ; Y1.2 55.186,-5.714 56.2,-4.7 C6.1
X32KO: C5.1 pad.2 U2.1 Y1.1 | length 9.2
  Bottom Layer w0.2: U2.1 53.85,-9.05 54,-8.9 53.971,-7.46 pad.2 54,-7.05 pad.2@54.144,-6.906 ; Y1.1 pad.2@54.144,-6.906 ; C5.1 55.2,-4.9 54.144,-5.956 pad.2@54.144,-6.906
pads on no net: SD1.0 SD1.9 U1. U2.24 U2.47 U2.48 U2.51 U3.1 U3.2 U3.10 USB1.0 USB2.4 USB2.5@22.2,-2.017 USB2.5@30,-2.017

## Polygon pours and split planes (outlines as drawn)
VCC_5V_USB on Bottom Layer "VCC_5V_USB" (hatched 45Degree grid 0.2 track 0.2, remove dead copper, pour order 0): 14.15,-14.75 13.75,-15.15 12.35,-15.15 12.1,-15.4 12.1,-15.75 12.55,-16.2 12.55,-18.15 12.9,-18.5 14,-18.5 14.6,-17.9 14.6,-16 15.2,-15.4 15.2,-14.95 15,-14.75
VBAT on Bottom Layer "VBAT" (hatched 45Degree grid 0.2 track 0.2, remove dead copper, pour order 2): 21.25,-12.35 20,-13.6 20,-13.8 19.45,-14.35 16.3,-14.35 15.9,-14.75 15.9,-15.35 15,-16.25 15,-17.4 15.2,-17.6 15.25,-17.55 17.6,-17.55 18.9,-16.25 25.75,-16.25 26.65,-15.35 26.65,-13.6 25.4,-12.35
NetL4_1 on Bottom Layer "L4-1" (hatched 45Degree grid 0.2 track 0.2, remove dead copper, pour order 4): 23.9,-19.1 20.55,-19.1 19.15,-20.5 17.65,-20.5 17.55,-20.6 17.55,-21.25 17.9,-21.6 23.85,-21.6 24.15,-21.3 24.15,-19.35
5V_OUT on Bottom Layer "5V-OUT" (hatched 45Degree grid 0.2 track 0.2, remove dead copper, pour order 6): 9,-20.5 6.45,-17.95 6.45,-11.5 5.95,-11 5.05,-11 4.5,-11.55 4.5,-18.9 6.4,-20.8 7.5,-20.8 8.4,-21.7 13.6,-21.7 14.15,-21.15 14.15,-20.65 14,-20.5
AGND on Bottom Layer "AGND" (hatched 45Degree grid 0.18 track 0.18, remove dead copper, pour order 16): 48.15,-2.65 47.45,-1.95 40.7,-1.95 38.2,-4.45 38.2,-6.75 38.9,-7.45 41.9,-7.45 43.65,-9.2 45.75,-9.2 46.2,-8.75 46.2,-5.2 48.15,-3.25
GND on Bottom Layer "GND" (hatched 45Degree grid 0.18 track 0.18, remove dead copper, pour order 18): -0.05,0.1 -0.05,-23.05 62.75,-23.05 62.75,0.1
VBAT on Top Layer "VBAT" (hatched 45Degree grid 0.2 track 0.2, remove dead copper, pour order 8): 11.3,-18.8 10.95,-18.45 10.95,-17.5 11.2,-17.25 14.25,-17.25 15.95,-17.25 16.5,-16.7 16.5,-15.75 16.75,-15.5 18.75,-15.5 18.9,-15.65 18.9,-16.55 16.65,-18.8
VCC_5V_USB on Top Layer "VCC_5V_USB" (hatched 45Degree grid 0.2 track 0.2, remove dead copper, pour order 10): 27.4,-5.15 27.3,-5.25 27.3,-6.15 27.25,-6.15 27.05,-6.35 24.7,-6.35 22.05,-9 15.8,-9 12.15,-12.65 12.15,-16.55 12.35,-16.75 14.5,-16.75 14.7,-16.55 14.7,-14 16.8,-11.9 22.75,-11.9 26.5,-8.15 27.95,-8.15 28.35,-7.75 28.35,-5.8 27.7,-5.15
GND on Top Layer "GND" (hatched 45Degree grid 0.18 track 0.18, remove dead copper, pour order 12): -0.05,0 62.85,0 62.85,-23 -0.05,-23

## Keep-outs
Keep-Out Layer:
  circle w0.1: c17.95,-5.916 r0.7
  circle w0.1: c18,-3.05 r0.7
  circle w0.1: c40.5,-2.7 r0.7
  circle w0.1: c40.5,-2.7 r0.7
  circle w0.1: c17.95,-5.916 r0.7
  circle w0.1: c18,-3.05 r0.7
  circle w0.1: c57,-21 r0.7
  lines w0.1: 0,-19.5 0,-17.216 1.05,-17.216 1.05,-12.784 0,-12.784 0,0 3,0 15.099,0 18.29,0 18.29,-0.9 29.84,-0.9 34,-0.9 34,0 37.55,0 45.5,0 45.5,-0.9 62.7,-0.9 62.7,-12.75 61.65,-12.75 61.65,-17.25 62.7,-17.25 62.7,-19.5 62.669,-19.5 ccw(c62.669,-23.5) 58.7,-23 4,-23 ccw(c0.031,-23.5) 0.031,-19.5

## Other copper
Top Layer:
  rectangle net GND: 42.4,-20.45 45.9,-18.4
  rectangle net GND: 28.55,-2.75 30.9,-1.5
  rectangle net GND: 21.3,-2.75 23.85,-1.45
  rectangle net GND: 29.25,-9.55 30.15,-7.9
  rectangle net GND: 55.1,-15.9 55.75,-13.95
  rectangle net GND: 29.7,-8.35 30.4,-7.75
  rectangle net GND: 43.85,-6.1 45.2,-2.7
  rectangle net GND: 59.4,-6.15 60.4,-2.65
Bottom Layer:
  rectangle net GND: 12,-14.6 13.25,-10.1
  rectangle net GND: 14.3,-13.15 19.1,-10.85
  rectangle net GND: 0.3,-12.4 2.3,-6.35
  rectangle net GND: 14.7,-8.6 18.95,-7.15
  rectangle net GND: 21.2,-2.3 23.6,-1.2
  rectangle net GND: 28.65,-2.4 31,-1.2
  rectangle net GND: 19.55,-7.9 21.35,-6.95
  rectangle net GND: 30.85,-10.7 32,-8.95
  rectangle net GND: 22.9,-10.7 24.5,-10.1
  pour cut-out: 14.25,-18.15 17.45,-18.15 17.45,-21.05 14.25,-21.05

## Silkscreen, mask and mechanical layers (free items; w line width, h text height)
Top Overlay:
  circle w0.1: c18,-3.05 r1.3
  circle w0.1: c40.5,-2.7 r1.3
  circle w0.1: c57,-21 r1.3
  rectangle: 59.55,-11.9 61.45,-6.45
  rectangle: 13.4,-20.6 14.5,-16.7
  rectangle: 10.1,-17.15 14.5,-16.3
  rectangle: 9.75,-20.55 10.55,-16.3
  rectangle: 9.75,-20.6 13.7,-19.8
  lines w0.1: 58.699,-0.7 58.699,-0.5 58.699,0.3 58.699,1.2 ; 47.698,0 49.196,-0.419 ccw(c50.848,4.3) 50.848,-0.7 59.499,-0.7 59.499,-14.8 44.698,-14.8 44.699,0 47.698,0 ; 47.698,0 47.698,1.2 ; 47.698,1.2 ccw(c53.199,26.108) 58.699,1.2 ; 47.698,1.2 47.698,1.377 ; 47.699,1.377 ccw(c53.199,26.108) 58.698,1.377 ; 47.698,1.377 47.698,1.8 cw(c48.299,1.8) 48.299,2.4 58.099,2.4 cw(c58.099,1.8) 58.699,1.8 58.699,1.377 ; 58.699,1.2 58.699,1.377 ; -0.95,-17.516 -0.95,-12.484 1.85,-12.484 1.85,-17.516 -0.95,-17.516 ; 1.8,-3.2 3,-3.2 3,0.3 1.8,0.3 1.8,-3.2 ; 3.3,-2.7 4.3,-2.7 4.3,-1 3.3,-1 3.3,-2.7 ; 6.8,-2.7 7.8,-2.7 7.8,-1 6.8,-1 6.8,-2.7 ; 10.15,-20.05 13.85,-20.05 13.85,-16.75 10.15,-16.75 10.15,-20.05 ; 10.3,-2.7 11.3,-2.7 11.3,-1 10.3,-1 10.3,-2.7 ; 13.8,-2.7 14.8,-2.7 14.8,-1 13.8,-1 13.8,-2.7 ; 15.1,-3.2 16.3,-3.2 16.3,0.3 15.1,0.3 15.1,-3.2 ; 22.39,-4.9 22.815,-4.9 23.64,-4.9 23.665,-4.9 24.14,-4.9 28.09,-4.9 28.565,-4.9 28.59,-4.9 29.415,-4.9 29.84,-4.9 29.84,0.6 22.39,0.6 22.39,-4.9 ; 25.85,-19 36.85,-19 36.85,-16 25.85,-16 25.85,-19 ; 32.25,-3.2 33.45,-3.2 33.45,0.3 32.25,0.3 32.25,-3.2 ; 33.75,-3.2 34.75,-3.2 34.75,-1.5 33.75,-1.5 33.75,-3.2 ; 36.25,-3.2 37.25,-3.2 37.25,-1.5 36.25,-1.5 36.25,-3.2 ; 37.55,-3.2 38.75,-3.2 38.75,0.3 37.55,0.3 37.55,-3.2 ; 42.4,-20.85 46.1,-20.85 46.1,-17.6 42.4,-17.6 42.4,-20.85 ; 60.85,-17.55 60.85,-12.45 63.65,-12.45 63.65,-17.55 60.85,-17.55
  text "+" at 12.45,-7.85 h1.2
  text "IO" at 8.3,-7.9 h1
  text "MIC" at 39.8,-8.9 h1
  text "PIR" at 4.7,-10.3 h1
  text "DH-8412V1" at 17.3,-14.45 h1.2
  text "LED+" at 2.45,-16.8 h1
  text "BAT-" at 42.65,-16.9 h1
  text "LED+" at 54.35,-18.15 h1
  text "BAT+" at 10.4,-22.6 h1
Bottom Overlay:
  lines w0.1: 38.901,0 38.899,-4.3 42.099,-4.3 42.101,0 ; 0.606,-25.053 5.9,-25.053 5.9,-20.5 0.606,-20.5 0.606,-25.053 ; 2.5,-8.5 2.5,1.8 3,1.8 15.1,1.8 15.6,1.8 15.6,-8.5 15.1,-8.5 3,-8.5 2.5,-8.5 ; 16.349,-7.516 19.549,-7.516 19.551,-1.9 33.9,-1.9 33.9,1.3 16.351,1.3 16.349,-7.516 ; 24.7,-23.799 28.7,-23.799 28.7,-21.7 24.7,-21.7 24.7,-23.799 ; 34.95,-3 34.95,-1 36.95,-1 36.95,-3 34.95,-3 ; 45.2,-1.9 61.65,-1.9 61.65,-23 63.15,-23 63.15,1.517 45.2,1.517 45.2,-1.9 ; 55.8,-23.954 58.728,-23.954 58.7,-20.1 55.8,-20.1 55.8,-23.954
  text "M" at 58.35,-7.7 h1
  text "+" at 58.3,-8.95 h1
  text "k1" at 59,-10.4 h1
  text "k2" at 59.25,-12 h1
Mechanical 1:
  lines w0.1: 59.498,-0.9 62.7,-0.9

## Text inside footprints (layer, text, board x,y; h text height)
MIC1: Top Overlay "+" at 43.35,-5.85 h1.02 r180